# Altium PCB dinhdung.PcbDoc
Units mil, origin at the board's own origin, x right, y up, seen from the top; angles counter-clockwise.
Board outline 5350.02 x 4258.31 mil, 2 copper layers (Top Layer, Bottom Layer); 43 components, 44 nets, 176 pads, 0 vias.
Unrouted connection lines stored in the file: 1.
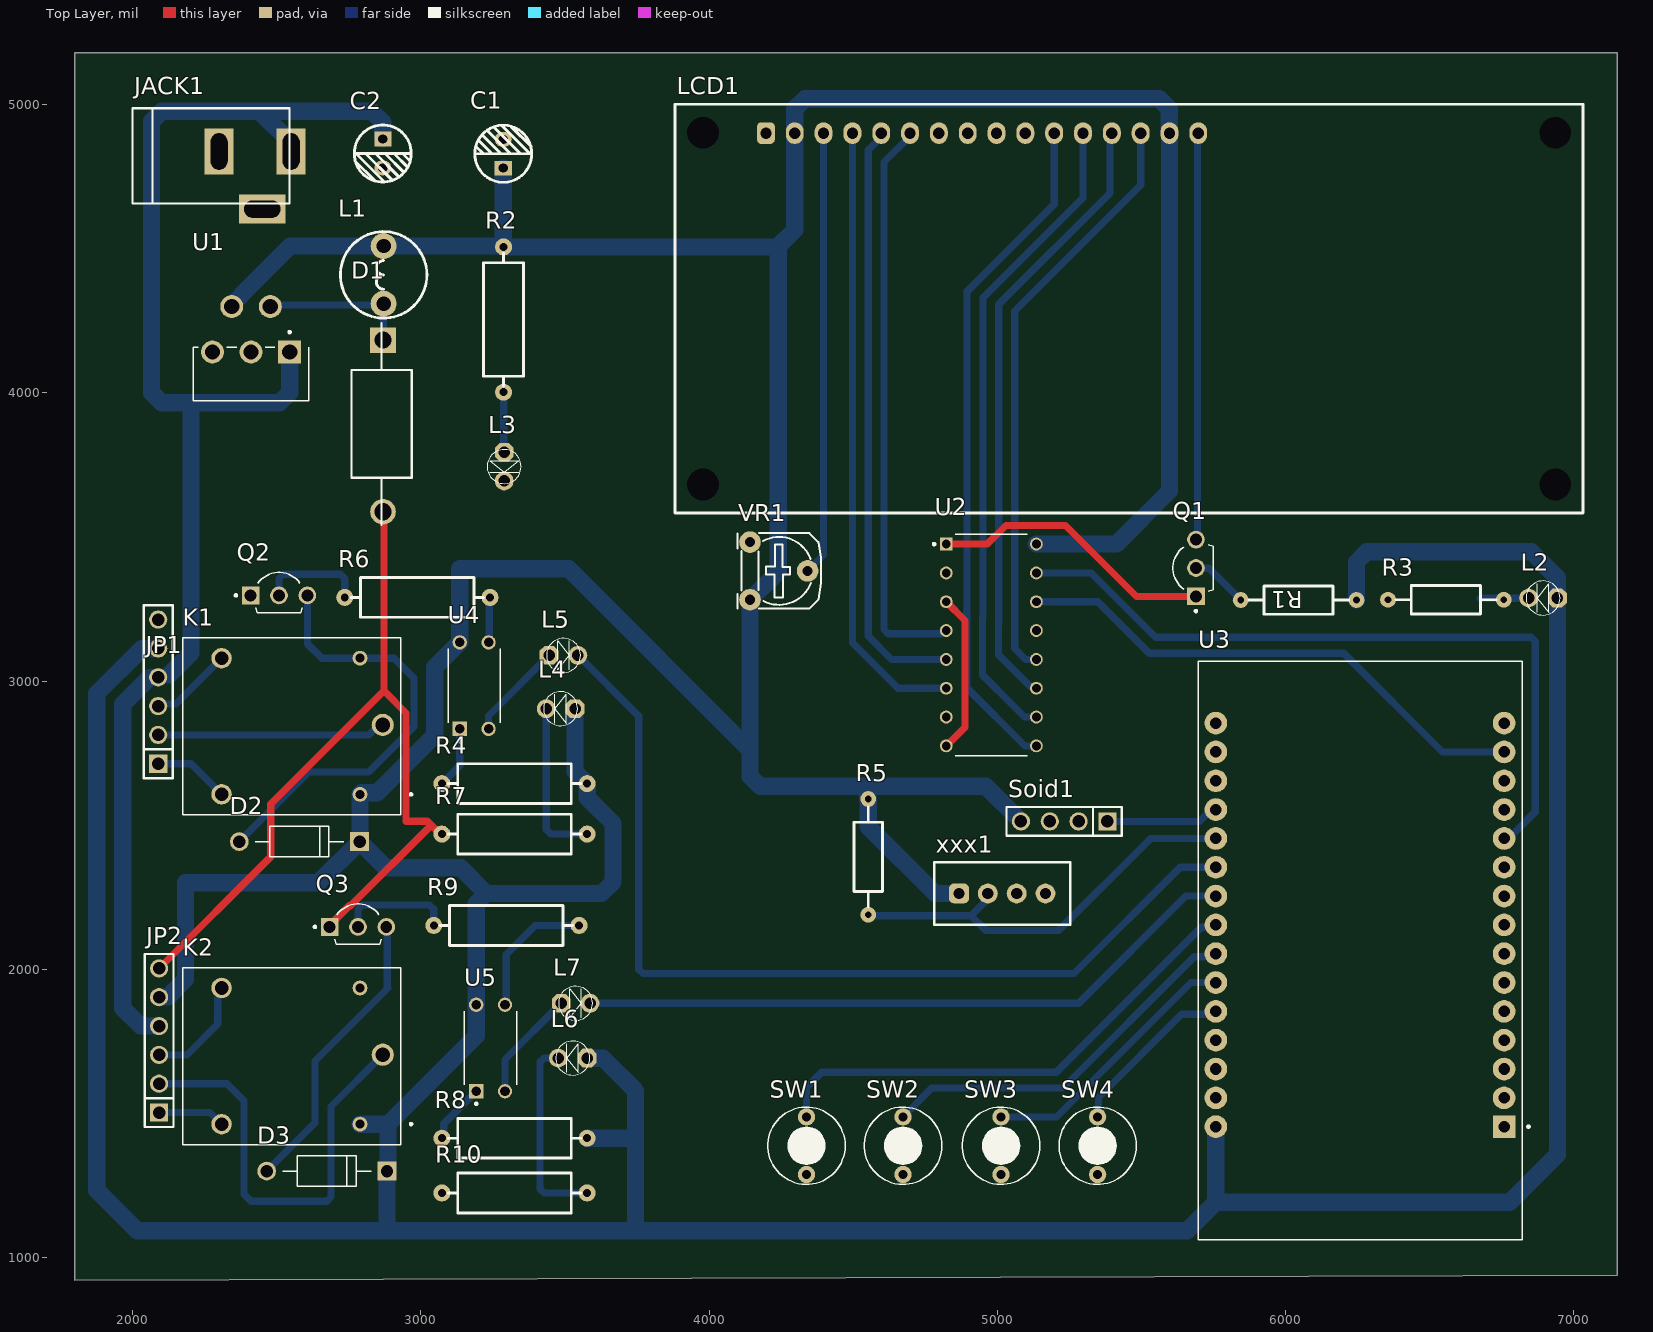
[diagram p0: Top Layer view]
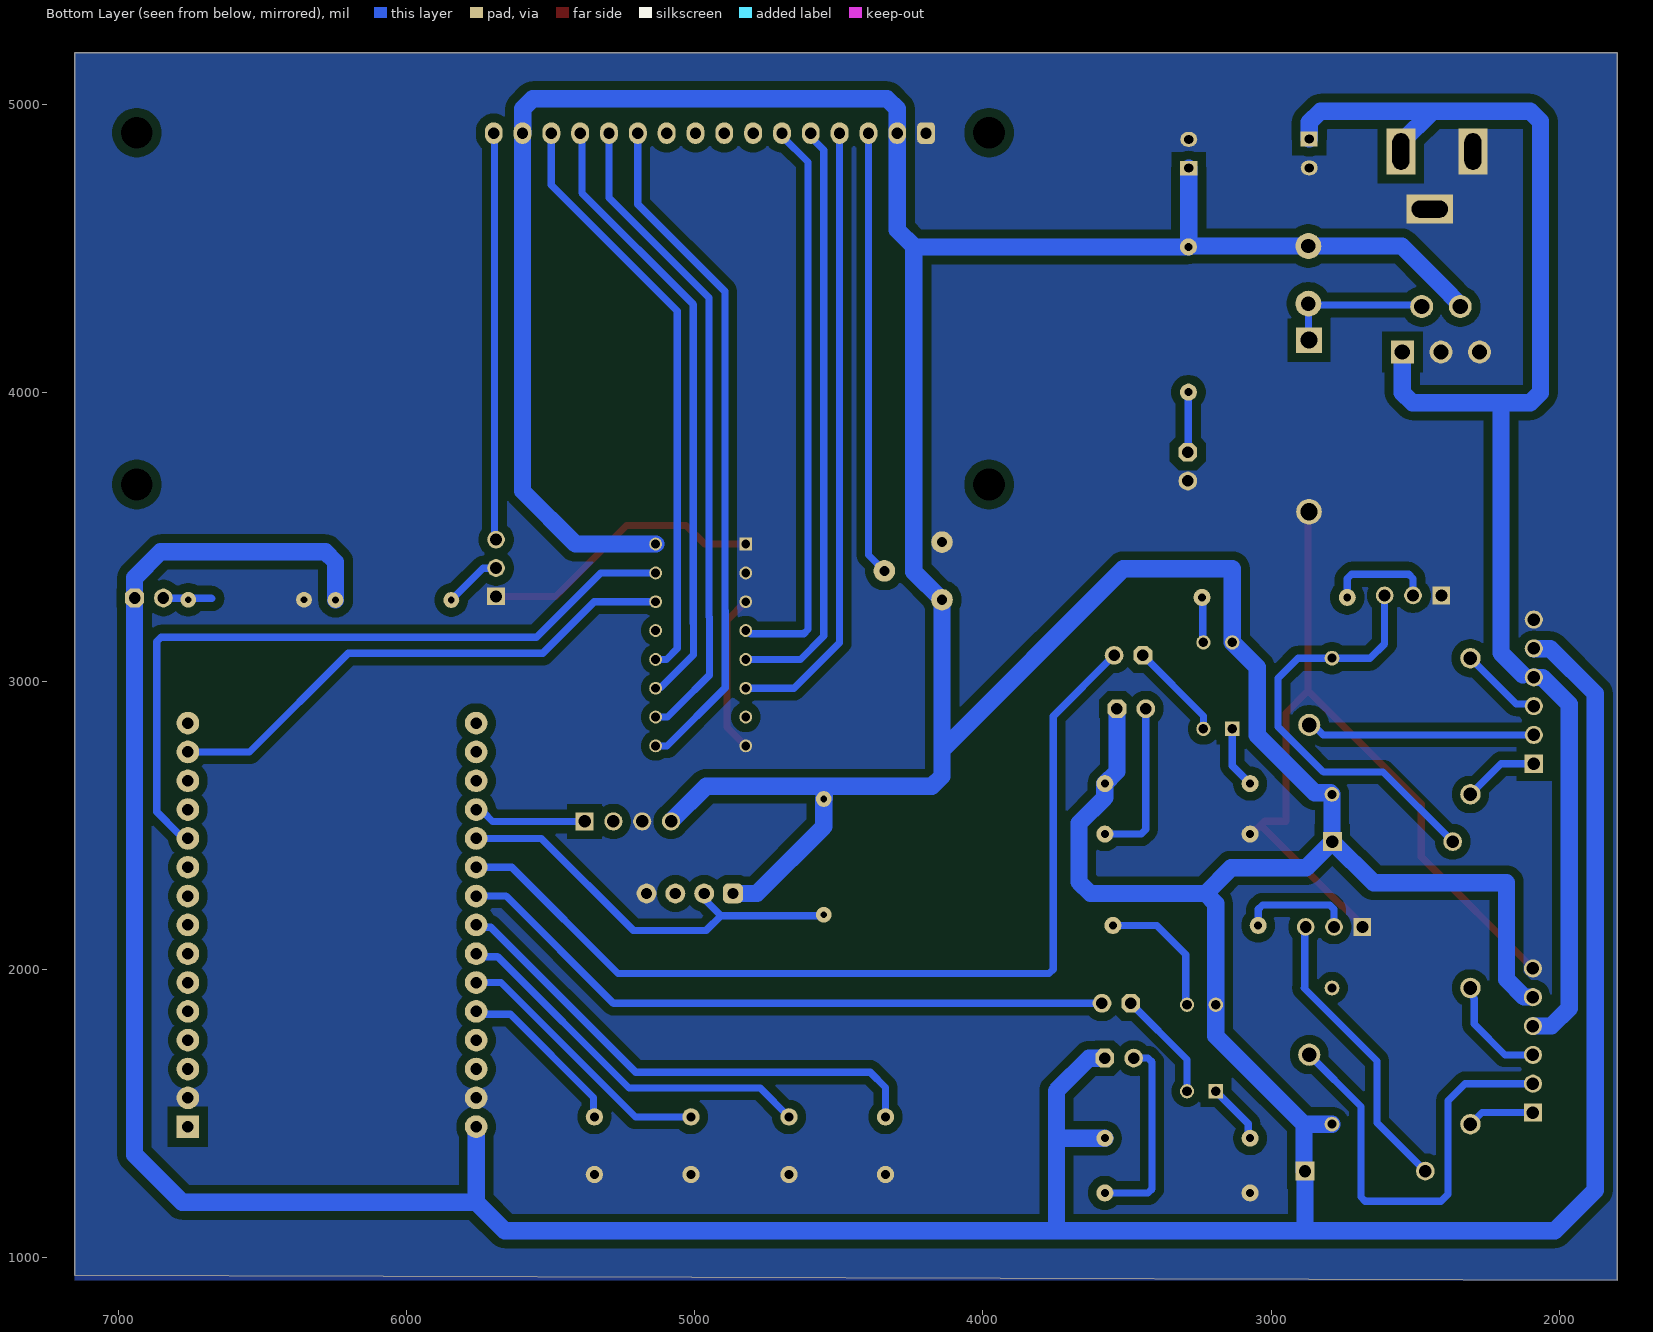
[diagram p1: Bottom Layer view, seen from below]
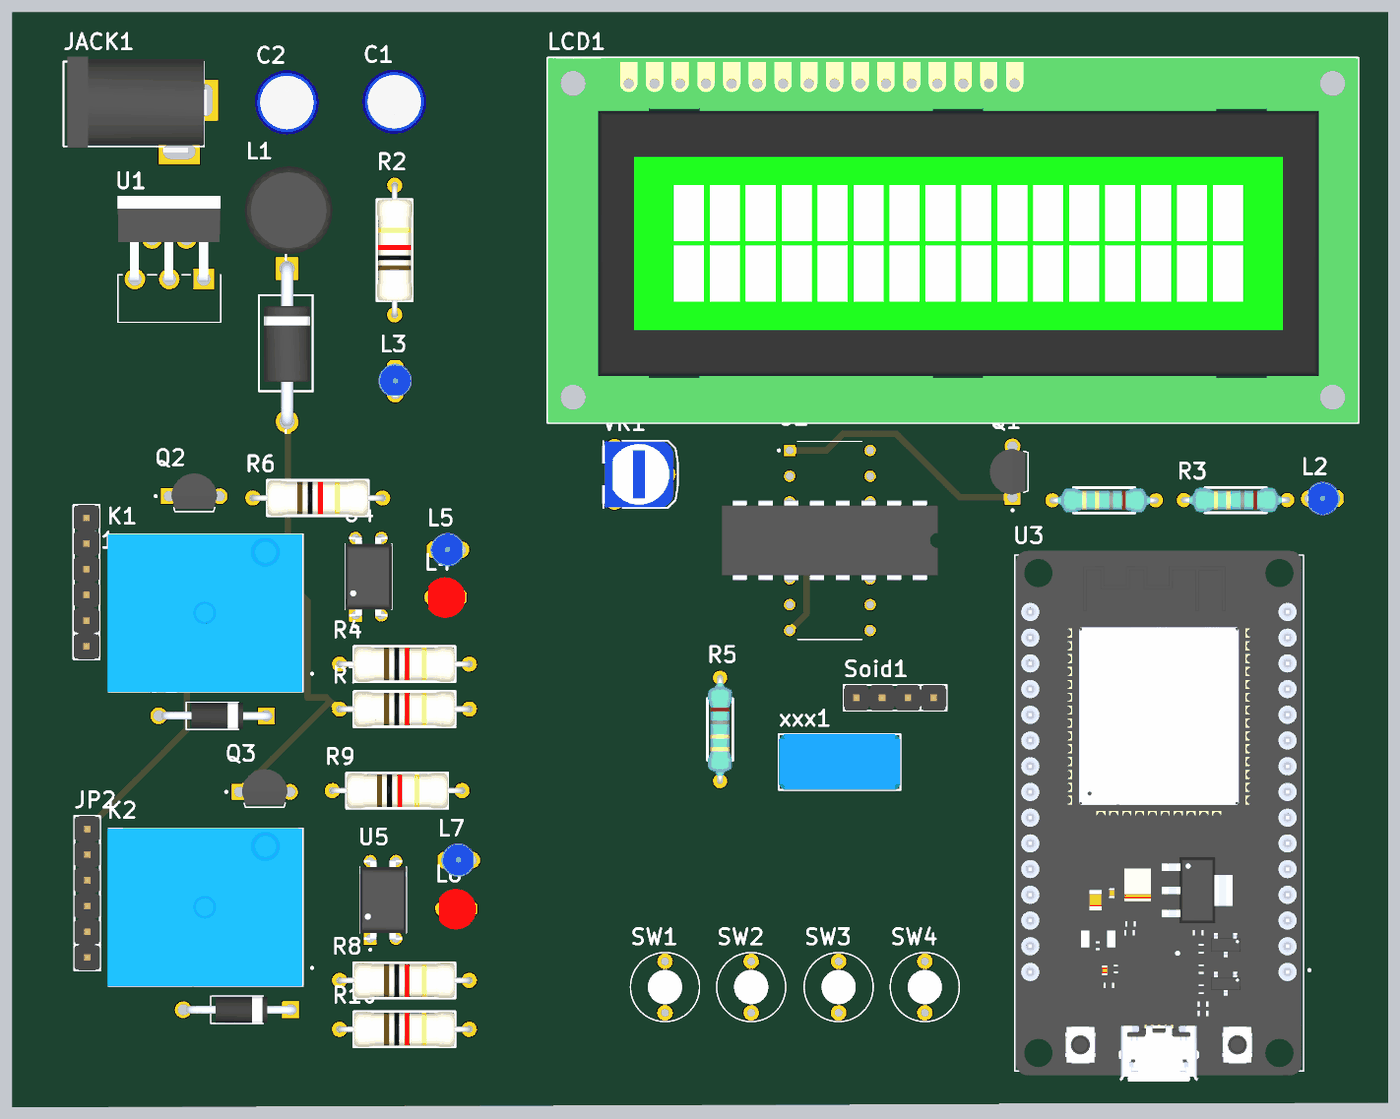
[diagram p2: 3D render of the assembled board from above, using the file's embedded part models]

## Layer stack, top to bottom
Top Solder: solder mask 0.4, Solder Resist, Dk 3.5
Top Layer: signal copper 1.4
Dielectric 1: dielectric 12.6, FR-4, Dk 4.8
Bottom Layer: signal copper 1.4
Bottom Solder: solder mask 0.4, Solder Resist, Dk 3.5

## Board outline
1799.99,920.69 1799.98,5179 7150,5179 7150,938.45

## Design rules (kind name [scope] priority, off if disabled: settings)
Clearance [All] p1: gap=30 ignorepadtopadclearanceinfootprint=TRUE
PolygonConnect [All] p1: connectstyle=Direct reliefconductorwidth=10 reliefentries=4 polygonreliefangle="90 Angle" airgapwidth=10
RoutingVias [All] p1: holewidth=28 width=50 viastyle="Through Hole" minholewidth=28 minwidth=50 maxholewidth=28 maxwidth=50
SolderMaskExpansion [All] p1: expansion=4 istentingtop=FALSE
UnRoutedNet [All] p1: checkbadconnections=TRUE
Width Width_2 [InNet('VCC')] p1: maxlimit=60 minlimit=10 preferedwidth=60
Width Width_1 [InNet('12V+')] p2: maxlimit=60 minlimit=10 preferedwidth=60
Width [All] p3: maxlimit=25 minlimit=10 preferedwidth=25
29 further rules are at their usual default settings.

## Components (designator, comment, footprint, x,y, rotation, side; value= is the part's Value field where it differs from the comment)
C1 "220uF" "Tu hoa 5mm" 3286,4829 r90 top
C2 "680uF" "tu hoa 5mm" 2868,4830 r270 top
D1 "1N5822" DIOAD2120W130L950D530P 2863.87,3892.22 r270 top
D2 "1N4007" DIOAD1060W80L520D270 2579,2443 r180 top
D3 "1N4007" DIOAD1060W80L520D270 2674,1300 r180 top
JACK1 "" "JACK DC 5.5" 2425,4737 r0 top value="Jac DC"
JP1 "JP 1x6 2.54" "JP 1x6 DT" 2089,2713 r90 top
JP2 "JP 1x6 2.54" "JP 1x6 DT" 2092,1503 r90 top
K1 "SRD-5VDC-SL-C" RELAY_SRD-12VDC-SL-C 2549,2843 r180 top
K2 "SRD-5VDC-SL-C" RELAY_SRD-12VDC-SL-C 2549,1699 r180 top
L1 "33uH" "CUON CAM 100uH3A" 2871,4409 r90 top
L2 "LED 3mm" LED-3MM-BLUE 6888,3288 r180 top
L3 "LED 3mm" LED-3MM-BLUE 3289,3739 r270 top
L4 "LED 3mm" LED-3MM-RED 3535,2904 r180 top
L5 "LED 3mm" LED-3MM-BLUE 3500,3089 r0 top
L6 "LED 3mm" LED-3MM-RED 3577,1692 r180 top
L7 "LED 3mm" LED-3MM-BLUE 3542,1882 r0 top
LCD1 "LCD 16x2" "LCD 1602B" 5457,4292 r0 top
Q1 "8050" TO92250P457H470-3B 5689,3392 r90 top
Q2 "S8050-D-AP" TO92250P457H470-3B 2508,3297 r0 top
Q3 "S8050-D-AP" TO92250P457H470-3B 2782,2147 r0 top
R1 "4.7k" "tro vach 1/4w" 6045,3281 r0 top
R2 "330" "tro vach 1/2w" 3287,4253.97 r90 top
R3 "1k" "tro vach 1/4w" 6556,3282 r0 top
R4 "1k" "tro vach 1/2w" 3325,2644 r0 top
R5 "10k" "tro vach 1/4w" 4552,2390 r90 top
R6 "1k" "tro vach 1/2w" 2988,3290 r0 top
R7 "470" "tro vach 1/2w" 3325,2469 r0 top
R8 "1k" "tro vach 1/2w" 3325,1414 r0 top
R9 "1k" "tro vach 1/2w" 3297,2152 r0 top
R10 "1k" "tro vach 1/2w" 3325,1224 r0 top
Soid1 "JP 1x4 2.54" "JP 1x4 DT" 5382,2513 r180 top
SW1 "Button" SW/2/DIP 4338,1388 r270 top
SW2 "Button" SW/2/DIP 4673,1388 r270 top
SW3 "Button" SW/2/DIP 5013,1388 r270 top
SW4 "Button" SW/2/DIP 5348,1388 r270 top
U1 "LM2596T-5.0" TO170P1016X470X2092-5 2544.93,4141.52 r180 top
U2 "PCF8574N" DIP794W45P254L1969H508Q16 4979,3125 r0 top
U3 "ESP32-DEVKIT-V1" MODULE_ESP32_DEVKIT_V1 6258,2064 r180 top
U4 "PC817X3NSZ1B" DIP762W50P254L495H455Q4 3185,2984 r90 top
U5 "PC817X3NSZ1B" DIP762W50P254L495H455Q4 3242,1727 r90 top
VR1 "10K" "Bien Tro Tam Giac Dung" 4142,3482 r270 top
xxx1 "DTH11" DTH11 5017,2263 r0 top

## Footprints (in the part's own frame and the unit in brackets; to place one, negate y for a bottom-side part, rotate by r counter-clockwise, add the part's x,y. Pads: shape width x height; smd on the part's side, far side on the other; paste and mask are expansions set on the pad)
"Bien Tro Tam Giac Dung" [mil] "RM065"
  round 75 hole 35: 1(0,0) 2(100,200) 3(200,0)
  silkscreen extent -31,-44 231,246, body extent -28,-50 228,228, height 279
"CUON CAM 100uH3A" [mil] "100uH3A"
  round 90 hole 50: 1(-100,0) 2(100,0)
  silkscreen extent -150,-150 150,150, body extent -171,-175 171,167, height 394
DIOAD1060W80L520D270 [mm]
  round 1.65 hole 1.1: A(5.3,0)
  rect 1.65x1.65 / inner round 1.65 / far side rect 1.65x1.65 hole 1.1: C(-5.3,0)
  silkscreen extent -3.9,-1.35 3.9,1.35, body extent -5.93,-1.3 5.02,1.29, height 2.89
DIOAD2120W130L950D530P [mm]
  round 2.25 hole 1.5: A(7.747,0.127)
  rect 2.25x2.25 / inner round 2.25 / far side rect 2.25x2.25 hole 1.5: C(-7.366,0.127)
  silkscreen extent -8.89,-2.65 8.89,2.65, body extent -8,-2.17 8.2,2.43, height 4.6
DIP762W50P254L495H455Q4 [mm]
  rect 1.26x1.26 / inner round 1.26 / far side rect 1.26x1.26 hole 0.84: 1(-3.81,1.27)
  round 1.26 hole 0.84: 2(-3.81,-1.27) 3(3.81,-1.27) 4(3.81,1.27)
  silkscreen extent -5.01,-2.3 3.25,2.3, body extent -3.94,-2.3 3.94,2.3, height 4.55
DIP794W45P254L1969H508Q16 [mm]
  rect 1.13x1.13 / inner round 1.13 / far side rect 1.13x1.13 hole 0.78: 1(-3.97,8.89)
  round 1.13 hole 0.78: 2(-3.97,6.35) 3(-3.97,3.81) 4(-3.97,1.27) 5(-3.97,-1.27) 6(-3.97,-3.81) 7(-3.97,-6.35) 8(-3.97,-8.89) 9(3.97,-8.89) 10(3.97,-6.35) 11(3.97,-3.81) 12(3.97,-1.27) 13(3.97,1.27) 14(3.97,3.81) 15(3.97,6.35) 16(3.97,8.89)
  silkscreen extent -5.13,-9.77 3.17,9.77, body extent -3.95,-10.67 3.95,10.67, height 5.08
DTH11 [mm] "Temperature and humidity module"
  rrect50% 1.75x1.75 hole 1: 1(-3.81,0)
  round 1.75 hole 1: 2(-1.27,0) 3(1.27,0) 4(3.81,0)
  silkscreen extent -6,-2.75 6,2.75, body extent -6,-2.75 6,2.75, height 15.75
"JACK DC 5.5" [mil] "Jac DC input"
  rect 100x160 hole 59.06 slot 125.98 at 90 deg: 1(125,100) 2(-125,100)
  rect 160x100 hole 59.06 slot 125.98 at 0 deg: 3(25,-100)
  silkscreen extent -425,-80 120,250, body extent -410,-105 134,269, height 434
"JP 1x4 DT" [mm] "4 pins, 1 row, straight, gold plating"
  rect 1.6x1.6 hole 1.1: 1(0,0)
  round 1.6 hole 1.1: 2(2.54,0) 3(5.08,0) 4(7.62,0)
  silkscreen extent -1.27,-1.27 8.89,1.27, body extent -1.27,-1.27 8.89,1.27, height 8.54
"JP 1x6 DT" [mm] "6 pins, 1 row, straight, gold plating"
  rect 1.6x1.6 hole 1.1: 1(0,0)
  round 1.6 hole 1.1: 2(2.54,0) 3(5.08,0) 4(7.62,0) 5(10.16,0) 6(12.7,0)
  silkscreen extent -1.27,-1.27 13.97,1.27, body extent -1.27,-1.27 13.97,1.27, height 8.54
"LCD 1602B" [mm]
  rrect50% 1.575x1.905 hole 0.991: 1(-32,15.46)
  oval 1.575x1.905 hole 0.991: 2(-29.46,15.46) 3(-26.92,15.46) 4(-24.38,15.46) 5(-21.84,15.46) 6(-19.3,15.46) 7(-16.76,15.46) 8(-14.22,15.46) 9(-11.68,15.46) 10(-9.14,15.46) 11(-6.6,15.46) 12(-4.06,15.46) 13(-1.52,15.46) 14(1.02,15.46) 15(3.56,15.46) 16(6.1,15.46)
  round 0 hole 2.8: HOLE(-37.55,15.5) HOLF(37.55,15.5) HOLG(37.55,-15.5) HOLH(-37.55,-15.5)
  silkscreen extent -40,-18 40,18, body extent -40,-18 40,18, height 11
LED-3MM-BLUE [mil]
  oct 65x65 hole 40: 1(-55,0)
  round 65 hole 40: 2(45,0)
  silkscreen extent -64,-59 54,59, body extent -72,-65 54,65, height 184
LED-3MM-RED [mil]
  oct 65x65 hole 40: 1(0,0)
  round 65 hole 40: 2(100,0)
  silkscreen extent -9,-59 109,59, body extent -27,-77 117,80, height 181
MODULE_ESP32_DEVKIT_V1 [mm]
  rect 2x2 / inner round 2 / far side rect 2x2 hole 1.02: 1(-12.7,15.494)
  round 2 hole 1.02: 2(-12.7,12.954) 3(-12.7,10.414) 4(-12.7,7.874) 5(-12.7,5.334) 6(-12.7,2.794) 7(-12.7,0.254) 8(-12.7,-2.286) 9(-12.7,-4.826) 10(-12.7,-7.366) 11(-12.7,-9.906) 12(-12.7,-12.446) 13(-12.7,-14.986) 14(-12.7,-17.526) 15(-12.7,-20.066) 16(12.7,-20.066) 17(12.7,-17.526) 18(12.7,-14.986) 19(12.7,-12.446) 20(12.7,-9.906) 21(12.7,-7.366) 22(12.7,-4.826) 23(12.7,-2.286) 24(12.7,0.254) 25(12.7,2.794) 26(12.7,5.334) 27(12.7,7.874) 28(12.7,10.414) 29(12.7,12.954) 30(12.7,15.494)
  silkscreen extent -14.95,-25.5 14.23,25.45, body extent -14.1,-25.92 14.1,26.53, height 7.05
RELAY_SRD-12VDC-SL-C [mm]
  round 1.308 hole 0.8: COIL1(-6.1,6) COIL2(-6.1,-6)
  round 1.95 hole 1.3: COM(-8.1,-0.12)
  round 1.8 hole 1.2: NC(6.1,6) NO(6.1,-6)
  silkscreen extent -10.7,-7.8 9.5,7.8, body extent -9.6,-7.8 9.6,7.8, height 15.8
SW/2/DIP [mil]
  round 60 / inner round 62 / far side round 60 hole 31: 1(-100,0) 2(100,0)
  silkscreen extent -134,-134 134,134, body extent -134,-134 135,135, height 150
TO170P1016X470X2092-5 [mm]
  rect 2.025x2.025 / inner round 2.025 / far side rect 2.025x2.025 hole 1.35: 1(0,0)
  round 2.025 hole 1.35: 2(1.7,-4) 3(3.4,0) 4(5.1,-4) 5(6.8,0)
  silkscreen extent -1.68,-1.85 8.48,4.28, body extent -1.65,-8.22 8.51,0.25, height 20.93
TO92250P457H470-3B [mm]
  rect 1.56x1.56 / inner round 1.56 / far side rect 1.56x1.56 hole 1.04: 1(-2.5,0)
  round 1.56 hole 1.04: 2(0,0) 3(2.5,0)
  silkscreen extent -3.9,-1.53 2.03,2.02, body extent -2.25,-1.25 2.25,2.25, height 4.7
"tro vach 1/2w" [mm]
  round 1.5 hole 0.7: 1(-6.4,0) 2(6.4,0)
  silkscreen extent -5.84,-1.75 5.84,1.75, body extent -6.62,-1.75 6.62,1.75, height 3.5
"tro vach 1/4w" [mm]
  round 1.4 hole 0.6: 1(-5.1,0) 2(5.1,0)
  silkscreen extent -4.39,-1.25 4.42,1.25, body extent -5.38,-1.2 5.38,1.2, height 2.41
"Tu hoa 5mm" [mm]
  rect 1.3x1.5 hole 0.8: 1(-1.27,0)
  oval 1.3x1.5 hole 0.8: 2(1.27,0)
  silkscreen extent -2.51,-2.51 2.51,2.51, body extent -3.12,-3.18 3.23,3.18, height 14.55
"tu hoa 5mm" [mm]
  rect 1.3x1.5 hole 0.8: 1(-1.27,0)
  oval 1.3x1.5 hole 0.8: 2(1.27,0)
  silkscreen extent -2.51,-2.51 2.51,2.51, body extent -3.12,-3.18 3.23,3.18, height 14.55

## Part data
C1: library part "Tu Hoa 220uF 16V 6x11", "Cắm", Chung_Loai=Cắm, Don_Vi=Con, Ma_Hang=MH001348, So_Chan=2, Ten_Linh_Kien="Tụ Hóa 220uF 16V 6x11MM"
C2: library part "Tu Hoa 100uF 16V 5x7", "Cắm", Chung_Loai=Cắm, Don_Vi=Con, Ma_Hang=MH001347, So_Chan=2, Ten_Linh_Kien="Tụ Hóa 100uF 16V 5x7MM"
D1: "Schottky, DO-201, 40V, 3A, 150Â°C", Package="DO-201 Diotec", Check_prices=https://www.snapeda.com/parts/1N5822/Diotec/view-part/?ref=eda, MF="Diotec Semiconductor", MP=1N5822, SnapEDA_Link=https://www.snapeda.com/parts/1N5822/Diotec/view-part/?ref=snap
D2 D3: "Diode Switching 1KV 1A Automotive 2-Pin Ammo", Package=None, Check_prices=https://www.snapeda.com/parts/1N4007/EIC+Semiconductor/view-part/?ref=eda, MF=EIC, MP=1N4007, SnapEDA_Link=https://www.snapeda.com/parts/1N4007/EIC+Semiconductor/view-part/?ref=snap
JACK1: library part "JACK DC 5.5", "JACK DC 5.5"
JP1 JP2: library part "JP 1x6 2.54 Duc Thang", "Cắm", Chung_Loai=Cắm, Don_Vi=Con, Ma_Hang=MH000903, Ten_Linh_Kien="Jump Đơn Đực 2.54MM 1x40P Thẳng 11MM"
K1 K2: library part SRD-12VDC-SL-C, "General Purpose Non Latching 12VDC SPDT Through Hole Relays RoHS", Package="NON STANDARD-5 Songle Relay", Check_prices=https://www.snapeda.com/parts/SRD-12VDC-SL-C/Songle+Relay/view-part/?ref=eda, MF="Songle Relay", MP=SRD-12VDC-SL-C, SnapEDA_Link=https://www.snapeda.com/parts/SRD-12VDC-SL-C/Songle+Relay/view-part/?ref=snap
L1: library part "CUON CAM 100uH DIP", "Dán", Chung_Loai=Dán, Don_Vi=Con, Ma_Hang=MH002209, Ten_Linh_Kien="Cuộn Cảm 100uH 3A 8x10MM"
L2 L3 L5 L7: library part "LED 3mm Xanh Duong", "Cắm", Chung_Loai=Cắm, Don_Vi=Con, Ma_Hang=MH009003, Ten_Linh_Kien="LED 3MM Xanh Dương SS (1000c)"
L4 L6: library part "LED 3mm Do", "Cắm", Chung_Loai=Cắm, Don_Vi=Con, Ma_Hang=MH003892, Ten_Linh_Kien="Led 3MM Phủ Đỏ (10c)"
LCD1: "Character LCD 16x2"
Q1: library part S8050-D-AP, "Bipolar (BJT) Transistor NPN 25 V 500 mA 150MHz 625 mW Through Hole TO-92", Package="TO-92 MCC", Check_prices=https://www.snapeda.com/parts/S8050-D-AP/Micro+Commercial/view-part/?ref=eda, MF="Micro Commercial Co", MP=S8050-D-AP, SnapEDA_Link=https://www.snapeda.com/parts/S8050-D-AP/Micro+Commercial/view-part/?ref=snap
Q2 Q3: "Bipolar (BJT) Transistor NPN 25 V 500 mA 150MHz 625 mW Through Hole TO-92", Package="TO-92 MCC", Check_prices=https://www.snapeda.com/parts/S8050-D-AP/Micro+Commercial/view-part/?ref=eda, MF="Micro Commercial Co", MP=S8050-D-AP, SnapEDA_Link=https://www.snapeda.com/parts/S8050-D-AP/Micro+Commercial/view-part/?ref=snap
R1 R5: library part "Tro Vach 1/4W 1% 4.7k", "Cắm", Chung_Loai=Cắm, Don_Vi=Con, Ma_Hang=MH006350, So_Chan=2, Ten_Linh_Kien="Trở Vạch 1/4w 1% 4.7k"
R2: library part "Tro Vach 1/2W 5% 47K", "Cắm", Chung_Loai=Cắm, Don_Vi=Con, Ma_Hang=MH008002, So_Chan=2, Ten_Linh_Kien="Trở 5% 1/2w 47k"
R3: library part "Tro Vach 1/4W 5% 1k", "Cắm", Chung_Loai=Cắm, Don_Vi=Con, Ma_Hang=MH007390, So_Chan=2, Ten_Linh_Kien="Trở Vạch 1/4w 5% 1k"
R4 R6 R7 R8 R9 R10: library part "Tro Vach 1/2W 5% 1k", "Cắm", Chung_Loai=Cắm, Don_Vi=Con, Ma_Hang=MH007240, So_Chan=2, Ten_Linh_Kien="Trở 5% 1/2w 1K"
Soid1: library part "JP 1x4 2.54 Duc Thang", "Cắm", Chung_Loai=Cắm, Don_Vi=Con, Ma_Hang=MH000903, Ten_Linh_Kien="Jump Đơn Đực 2.54MM 1x40P Thẳng 11MM"
SW1 SW2 SW3 SW4: library part "SW SPST", "Tact switch 2 pin"
U1: "SIMPLE SWITCHERÂ® 4.5V to 40V, 3A Low Component Count Step-Down Regulator 5-TO-220", Package="TO-220-5 Texas Instruments", Check_prices=https://www.snapeda.com/parts/LM2596T-5.0/Texas+Instruments/view-part/?ref=eda, MF="Texas Instruments", MP=LM2596T-5.0, SnapEDA_Link=https://www.snapeda.com/parts/LM2596T-5.0/Texas+Instruments/view-part/?ref=snap
U2: "8-bit 2.5- to 5.5-V I2C/SMBus I/O expander with interrupt", Package="PDIP-16 Texas Instruments", Check_prices=https://www.snapeda.com/parts/PCF8574N/Texas+Instruments/view-part/?ref=eda, MF="Texas Instruments", MP=PCF8574N, SnapEDA_Link=https://www.snapeda.com/parts/PCF8574N/Texas+Instruments/view-part/?ref=snap
U3: "Dual core, Wi-Fi: 2.4 GHz up to 150 Mbits/s,BLE (Bluetooth Low Energy) and legacy Bluetooth, 32 bits, Up to 240 MHz", Package=None, Check_prices=https://www.snapeda.com/parts/ESP32-DEVKIT-V1/Do+it/view-part/?ref=eda, MF="Do it", MP=ESP32-DEVKIT-V1, SnapEDA_Link=https://www.snapeda.com/parts/ESP32-DEVKIT-V1/Do+it/view-part/?ref=snap
U4 U5: "Optoisolator Transistor Output - 1 Channel 4-DIP", Package="DIP-4 Sharp Microelectronics", Availability="In Stock", Check_prices=https://www.snapeda.com/parts/PC817X3NSZ1B/Sharp+Microelectronics/view-part/?ref=eda, MF="Sharp Microelectronics", MP=PC817X3NSZ1B, Price=None, Purchase-URL=https://pricing.snapeda.com/search/part/PC817X3NSZ1B/?ref=eda, SnapEDA_Link=https://www.snapeda.com/parts/PC817X3NSZ1B/Sharp+Microelectronics/view-part/?ref=snap
VR1: library part "Bien tro tam giac 10K Dung", "Cắm", Chung_Loai=Cắm, Don_Vi=Con, Ma_Hang=MH000919, Ten_Linh_Kien="Biến Trở Tam Giác 103-10K RM065 (Chân Đứng)"
xxx1: "Temperature and humidity module"

## Nets (pads, with @x,y where several pads share a name; then routed paths per layer and width w, separated by ;. In a path a pad name is that pad's centre, name@x,y a point inside that pad or via, vN(x,y) a via of type N, cw(c..) or ccw(c..) an arc to the next point about the centre after c; other vN are vias at no path point)
12V+: C2.1 JACK1.1 JP1.4 JP2.4 U1.1 | length 5010.1
  Bottom Layer w60: JP1.4 2088.43,3012.43 2059.03,3012.43 1966,2919.39 1966,1865.15 2027.57,1803.57 2091.43,1803.57 JP2.4 ; 2126.9,3021.5 2203,3097.61 2203,3965 ; U1.1 2544.93,4000.15 2509.78,3965 2203,3965 ; JACK1.1 2550,4867 2440,4977 ; C2.1 2868,4937.92 2828.92,4977 2440,4977 ; 2203,3965 2101.15,3965 2066,4000.15 2066,4941.85 2101.15,4977 2440,4977
D4: LCD1.11 U2.9 | length 2374.2
  Bottom Layer w25: U2.9 5096,2775 4894,2977 4894,3243.77 4895.2,3244.97 4895.2,4352.2 5197.16,4654.16 LCD1.11
D5: LCD1.12 U2.10 | length 2271
  Bottom Layer w25: U2.10 5094.32,2875 5055.64,2913.68 4949,3020.32 4949,3220.99 4950.2,3222.19 4950.2,4329.42 5297.16,4676.38 LCD1.12
D6: LCD1.13 U2.11 | length 2151.7
  Bottom Layer w25: U2.11 5131.57,2978.73 5116.49,2978.73 5004,3091.22 5004,3198.21 5005.2,3199.41 5005.2,4306.64 5391.33,4692.77 5391.33,4894.84 LCD1.13
D7: LCD1.14 U2.12 | length 2059.6
  Bottom Layer w25: U2.12 5098,3075 5060.2,3112.8 5060.2,4283.86 5497.16,4720.81 LCD1.14
D14: SW4.1 U3.26 | length 599.5
  Bottom Layer w25: SW4.1 5350.85,1490.85 5350.85,1555.5 5639.06,1843.72 5747.72,1843.72 U3.26
DHT22: R5.1 U3.20 xxx1.2 | length 1461.6
  Bottom Layer w25: R5.1 4555.16,2186.05 4908.96,2186.05 ; xxx1.2 4958.6,2254.6 4958.6,2235.69 4908.96,2186.05 ; U3.20 5532,2454 5213,2135 4960.01,2135 4908.96,2186.05
E: LCD1.6 U2.4 | length 1985.5
  Bottom Layer w25: LCD1.6 4697.16,4890.22 4607.16,4800.22 4607.16,3178.64 4621.8,3164 4806.43,3164 4817.43,3175 U2.4
GND: C1.2 C2.2 D1.A JACK1.2 JACK1.3 JP1.6 JP2.6 L3.2 LCD1.1 Q1.1 Q2.1 Q3.1 R3.1 R7.1 R10.1 Soid1.3 SW1.2 SW2.2 SW3.2 SW4.2 U1.3 U1.5 U2.1 U2.2 U2.3 U2.8 U3.2 U3.29 VR1.1 xxx1.4 | length 4577.7
  Top Layer w25: JP2.6 2479.55,2390.55 2479.55,2573.77 2872,2966.22 ; Q3.1 2701.78,2165.21 2701.78,2170.32 2751.68,2220.21 2756.21,2220.21 3036.02,2500.02 ; D1.A@2872,3580 2872,2966.22 ; R7.1 3067.03,2469 3022.64,2513.4 2948.78,2513.4 2948.78,2889.43 2872,2966.22 ; U2.8 4887.44,2839.74 4887.44,3210.26 U2.3 ; U2.1 4964.91,3475 5029.65,3539.74 5236.24,3539.74 5482.41,3293.57 Q1.1
IN1: L5.2 U3.21 | length 3337.7
  Bottom Layer w25: L5.2 3756,2878 3756,1999.64 3770.64,1985 5265.78,1985 5634.78,2354 U3.21
IN2: L7.2 U3.22 | length 2325.1
  Bottom Layer w25: L7.2 5282,1882 5654,2254 U3.22
IO34: Soid1.1 U3.19 | length 393
  Bottom Layer w25: Soid1.1 5701.22,2513 5731.94,2543.72 5747.72,2543.72 U3.19
NetD1_C: D1.C L1.1 U1.2 | length 531.6
  Bottom Layer w25: U1.2 2483,4304 2866,4304 L1.1 2871,4176 D1.C@2872,4175
NetD2_A: D2.A K1.COIL2 Q2.3 | length 1525.8
  Bottom Layer w25: D2.A 2611.78,2684.44 2819,2684.44 2976,2841.44 2976,3010 2906.78,3079.22 K1.COIL2 2656.78,3079.22 2606.43,3129.57 Q2.3
NetD3_A: D3.A K2.COIL2 Q3.3 | length 1033.5
  Bottom Layer w25: D3.A@2472.98,1292.35 2472.17,1293.17 D3.A 2633,1467.66 2633,1682.06 2886.16,1935.22 ; Q3.3 2883.87,2143.56 2883.87,1935.22
NetJP1_1: JP1.1 K1.NC | length 263.8
  Bottom Layer w25: JP1.1 2202.62,2713 K1.NC
NetJP1_2: JP1.2 K1.COM | length 793.3
  Bottom Layer w25: JP1.2 2819.16,2813 2853.89,2847.72 K1.COM
NetJP1_3: JP1.3 K1.NO | length 288.7
  Bottom Layer w25: JP1.3 2096.27,2920.27 2149.89,2920.27 K1.NO
NetJP2_1: JP2.1 K2.NC | length 233.5
  Bottom Layer w25: JP2.1 2268.62,1503 K2.NC
NetJP2_2: JP2.2 K2.COM | length 1530
  Bottom Layer w25: JP2.2 2328,1603 2386.78,1544.22 2386.78,1219.22 2411,1195 2673.36,1195 2688,1209.64 2688,1523.83 K2.COM
NetJP2_3: JP2.3 K2.NO | length 378.7
  Bottom Layer w25: JP2.3 2188.75,1703 2295.74,1809.99 2295.74,1897.64 2300.07,1901.97 2300.07,1926.44 K2.NO
NetL2_2: L2.2 R3.2 | length 159.8
  Bottom Layer w25: 6675,3286 6676,3287 6833,3287 L2.2@6834,3288
NetL3_1: L3.1 R2.1 | length 211.1
  Bottom Layer w25: R2.1 3286,4002 3285,4001 3288,3998 3288,3795 L3.1
NetL4_2: L4.2 R7.2 | length 567.6
  Bottom Layer w25: L4.2 3435,2485 3451,2469 R7.2
NetL5_1: L5.1 U4.2 | length 342
  Bottom Layer w25: U4.2 3235,2879 L5.1
NetL6_2: L6.2 R10.2 | length 678.8
  Bottom Layer w25: L6.2 3427.64,1692 3413,1677.36 3413,1238.64 3427.64,1224 R10.2
NetL7_1: L7.1 U5.2 | length 385.8
  Bottom Layer w25: U5.2 3292,1687 L7.1
NetLCD1_3: LCD1.3 VR1.2 | length 1541.5
  Bottom Layer w25: VR1.2 4397.16,3437.16 LCD1.3
NetLCD1_16: LCD1.16 Q1.3 | length 1412.4
  Bottom Layer w25: Q1.3@5692,3490.43 5694.58,3493 5694.58,4898.08 LCD1.16
NetQ1_2: Q1.2 R1.1 | length 201.2
  Bottom Layer w25: Q1.2 5690.12,3390.88 5734.34,3390.88 R1.1
NetQ2_2: Q2.2 R6.1 | length 364.3
  Bottom Layer w25: Q2.2 2508,3355.56 2522.64,3370.21 2721.39,3370.21 2736.03,3355.56 R6.1
NetQ3_2: Q3.2 R9.1 | length 392.9
  Bottom Layer w25: Q3.2 2782,2208.36 2796.64,2223 3030.39,2223 3045.03,2208.36 R9.1
NetR4_1: R4.1 U4.1 | length 215.7
  Bottom Layer w25: R4.1 3135,2705.97 U4.1
NetR6_2: R6.2 U4.3 | length 158.1
  Bottom Layer w25: U4.3 3237.48,3136.48 3237.48,3287.52 R6.2
NetR8_1: R8.1 U5.1 | length 212.3
  Bottom Layer w25: R8.1 3079.55,1420.52 3079.55,1464.55 U5.1
NetR9_2: R9.2 U5.3 | length 470.5
  Bottom Layer w25: U5.3 3296.71,1881.71 3296.71,2051.71 3397,2152 R9.2
NetSW1_1: SW1.1 U3.23 | length 1755.6
  Bottom Layer w25: SW1.1 4338,1590 4390.75,1642.75 5204.75,1642.75 5707.64,2145.64 5749.64,2145.64 U3.23
NetSW2_1: SW2.1 U3.24 | length 1319.4
  Bottom Layer w25: SW2.1 4772.75,1587.75 5227.53,1587.75 5683.5,2043.72 5747.72,2043.72 U3.24
NetSW3_1: SW3.1 U3.25 | length 938
  Bottom Layer w25: SW3.1 5205.56,1488 5671.56,1954 U3.25
RD: LCD1.5 U2.5 | length 2067.5
  Bottom Layer w25: LCD1.5 4597.16,4887.29 4552.16,4842.29 4552.16,3155.86 4633.02,3075 U2.5
RS: LCD1.4 U2.6 | length 2158.6
  Bottom Layer w25: LCD1.4 4497.16,3133.08 4655.24,2975 U2.6
SCL: U2.14 U3.14 | length 1838.5
  Bottom Layer w25: U2.14 5348,3275 5527,3096 6202,3096 6544,2754 U3.14
SDA: U2.15 U3.11 | length 2551.3
  Bottom Layer w25: U2.15 5325.78,3375 5548.78,3152 6851.36,3152 6866,3137.36 6866,2546.22 6791.91,2472.13 6790.67,2472.13 6774,2455.46 U3.11@6774,2454
VCC: C1.1 D2.C D3.C JP1.5 JP2.5 K1.COIL1 K2.COIL1 L1.2 L2.1 L4.1 L6.1 LCD1.2 LCD1.15 R1.2 R2.2 R4.2 R5.2 R8.2 Soid1.4 U1.4 U2.16 U3.30 U4.4 U5.4 VR1.3 xxx1.1 | length 27165.6
  Bottom Layer w60: JP1.5 2088.43,3112.43 2031.75,3112.43 1876,2956.67 1876,1233 2016.53,1092.47 2882.66,1092.47 ; JP2.5@2092.57,1903.57 2121.97,1903.57 2183.5,1965.1 2183.5,2300 2644.66,2300 D2.C ; U1.4 2344.14,4304.34 2378.14,4338.33 2378.14,4340.36 2546.77,4509 L1.2 3283.94,4509 R2.2@3286,4506.94 ; K2.COIL1 2886.16,1462.78 3192,1768.62 U5.4 3192,2227.85 3227.15,2263 ; D3.C 2882.66,1092.47 ; D3.C@2886.32,1300 2886.32,1449.56 ; C1.1 R2.2@3286,4506.94 ; L4.1 3535,2685.97 R4.2 3576.97,2595.61 3666.5,2506.08 3666.5,2302.5 3627,2263 3227.15,2263 ; R8.2 3738,1414 3745,1421 ; L6.1 3578.01,1690.99 3632.01,1690.99 3745,1578 3745,1421 ; xxx1.1 4784,2263 4552,2495 R5.2 4550,2592.79 4550,2635 ; Soid1.4 4960,2635 4550,2635 ; U2.16 5413,3475 5597.16,3659.16 LCD1.15 5596.77,4901.04 5596.77,4984.85 5561.63,5020 4332.69,5020 4297.54,4984.85 4297.54,4901.04 LCD1.2 4297.16,4564.53 4238.56,4505.94 ; U3.30 5758,1192 ; R1.2 6245.79,3412.85 6280.93,3448 6853,3448 6943,3358 L2.1 6943,1357 6778,1192 5758,1192 ; D2.C 2878.9,2351.76 3138.39,2351.76 3227.15,2263 ; D2.C 2789.16,2444.5 K1.COIL1 2794.32,2611.94 2849.03,2611.94 3048.5,2811.41 3048.5,3047.5 U4.4 3135,3389 3513,3389 4142,2760 ; 2882.66,1092.47 3745,1092.47 ; R2.2@3286,4506.94 R2.2 4238.56,4505.94 ; 3745,1092.47 3745,1421 ; 3745,1092.47 5658.47,1092.47 5758,1192 ; 4142,2760 VR1.3 4239.5,3379.5 4239.5,4505 4238.56,4505.94 ; 4142,2760 4142,2670.15 4177.15,2635 4550,2635
pads on no net: LCD1.7 LCD1.8 LCD1.9 LCD1.10 LCD1.HOLE LCD1.HOLF LCD1.HOLG LCD1.HOLH Soid1.2 U2.7 U2.13 U3.1 U3.3 U3.4 U3.5 U3.6 U3.7 U3.8 U3.9 U3.10 U3.12 U3.13 U3.15 U3.16 U3.17 U3.18 U3.27 U3.28 xxx1.3

## Polygon pours and split planes (outlines as drawn)
GND on Bottom Layer "GND_L02_P000" (solid, remove dead copper, pour order 0): 1800,5179 1800,920.69 7150,920.69 7150,5179